# Altium PCB 拼板.PcbDoc (part 2 of 2)
Units mm, origin at the board's own origin, x right, y up, seen from the top; angles counter-clockwise.
Board outline 44.22 x 88.11 mm, 2 copper layers (Top Layer, Bottom Layer); 126 components, 77 nets, 529 pads, 164 vias.
Unrouted connection lines stored in the file: 26.
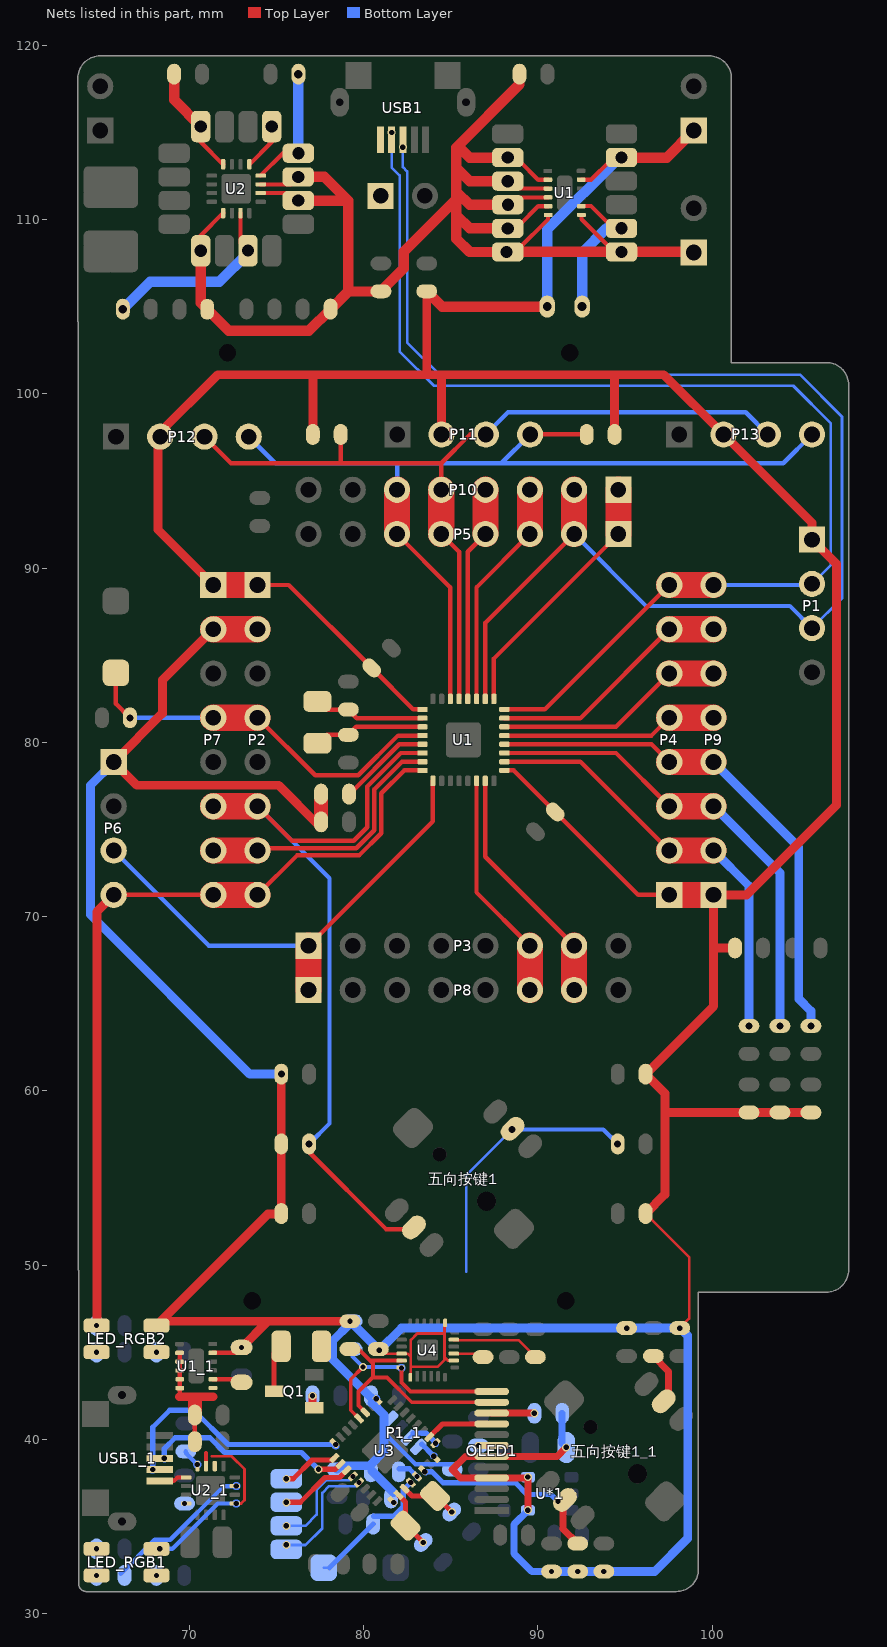
[diagram p2: the nets of this part, all layers, seen from the top]

## Via types
v1: diameter 0.46, hole 0.3, Top Layer to Bottom Layer, tented both sides, 77 vias
v2: diameter 0.3, hole 0.3, Top Layer to Bottom Layer, tented both sides, 30 vias
v3: diameter 1.1, hole 0.7, Top Layer to Bottom Layer, tented both sides, 30 vias
v4: diameter 0.64, hole 0.4, Top Layer to Bottom Layer, tented both sides, 21 vias
v5: diameter 0.8, hole 0.5, Top Layer to Bottom Layer, tented both sides, 6 vias

## Nets (pads, with @x,y where several pads share a name; then routed paths per layer and width w, separated by ;. In a path a pad name is that pad's centre, name@x,y a point inside that pad or via, vN(x,y) a via of type N, cw(c..) or ccw(c..) an arc to the next point about the centre after c; other vN are vias at no path point) (continued)
NetI1_2: I1.2@92.531,104.999 I1_1.2 pad.0@94.794,109.489 U1.2@92.489,110.763 U1_1.2 | length 9.3
  Top Layer w0.24: U1.2@92.489,110.763 93.049,110.763 pad.0@94.132,109.68
  Top Layer w0.254: U1_1.2@71.351,43.457 I1_1.2@72.66,43.457
  Bottom Layer w0.6: v5(92.531,104.999) 92.531,108.086 93.934,109.489 v3(94.794,109.489)
NetI2_2: I2.2 U3.5 | length 1.3
  Bottom Layer w0.254: v2@83.074,37.781 ccw(c83.059,37.88) v2@83.157,37.864
  Bottom Layer w0.3: I2.2@82.02,38.323 82.615,38.323 v2(83.059,37.88)
NetLED_RGB1_1: LED_RGB1.1 R1_1.1
  other v1: 64.678,33.726
NetLED_RGB1_3: LED_RGB1.3 R4_1.1
  other v1: 64.678,32.202
NetLED_RGB1_4: LED_RGB1.4 R2_1.1
  other v1: 68.107,32.202
NetLED_RGB2_1: LED_RGB2.1 R5_1.1
  other v1: 64.678,46.534
NetLED_RGB2_3: LED_RGB2.3 R8_1.1
  other v1: 64.678,45.01
NetLED_RGB2_4: LED_RGB2.4 R6_1.1
  other v1: 68.107,45.01
NetMotor-_2: Motor-.2 Q1.3 | length 2.7
  Top Layer w0.3: Q1.3@74.863,42.768 74.863,44.933 Motor-.2@75.277,45.346
NetOLED1_7: OLED1.7 R23.1
  other v2: 86.592,39.657
NetOLED1_10: OLED1.10 R22.1 | length 2.4
  Top Layer w0.152: v1@89.783,41.514 v1(89.793,41.504)
  Top Layer w0.4: OLED1.10@87.348,41.514 v1@89.783,41.514
NetPA15_1: PA15.1 U3.25 | length 3.3
  Top Layer w0.3: v1(75.562,37.745) 75.956,37.745 77.036,38.825 78.206,38.825 U3.25@78.321,38.94
NetPB4_1: PB4.1 U3.27 | length 4.2
  Top Layer w0.3: v1(75.562,36.396) 76.359,36.396 77.778,37.815 78.61,37.815 U3.27@79.028,38.233
NetPB5_1: PB5.1 U3.28 | length 5.8
  Bottom Layer w0.152: v1(75.562,35.047) 76.655,35.047 77.302,35.694 77.302,37.11 77.855,37.663 79.165,37.663 v2(79.382,37.88)
NetPB6_1: PB6.1 U3.29 | length 6.8
  Bottom Layer w0.152: PB6.1@75.556,33.948 76.667,33.948 77.626,34.907 77.626,36.936 78.01,37.32 79.529,37.32 v2(79.735,37.526)
  other v1: 75.562,33.954
NetQ1_1: Q1.1 R26.1 | length 0.7
  Top Layer w0.3: Q1.1@77.067,41.914 Q1.1@77.163,41.818
  Top Layer w0.46: Q1.1@77.067,41.914 v1(77.067,42.508)
NetR1_2: pad.0@70.654,115.327 R1.2@69.125,118.334 U2.16 | length 6.3
  Top Layer w0.24: v3(70.654,115.327) 70.654,114.449 U2.16@71.94,113.163
  Top Layer w0.6: R1.2@69.125,118.334 69.125,116.855 v3(70.654,115.327)
NetR2_2: pad.0@76.254,113.799 R2.2@76.254,118.334 U2.12 | length 7.2
  Top Layer w0.24: U2.12@74.09,112.513 75.376,113.799 v3(76.254,113.799)
  Bottom Layer w0.6: v3(76.254,113.799) v5(76.254,118.334)
NetR3_2: R3_1.2 U2_1.16
  other v2: 69.726,36.322
NetR4_2: R4.2@94.577,56.959 五向按键1.5 | length 15.7
  Bottom Layer w0.152: 85.877,49.627 85.877,55.143 v4(88.519,57.785)
  Bottom Layer w0.254: v4(88.519,57.785) 93.751,57.785 v4(94.577,56.959)
NetR7_2: R7_1.2 U2_1.12 | length 1.7
  Bottom Layer w0.254: R7_1.2@69.797,39.32 ccw(c70.042,39.32) 69.868,39.147 v2@70.38,38.635 ; v2(70.457,38.558) v2@70.38,38.635 ; v2@70.38,38.635 ccw(c70.457,38.558) 70.565,38.558 ccw(c70.457,38.558) v2@70.38,38.635
NetR17_2: R17.2 五向按键1_1.5 | length 3.1
  Top Layer w0.4: R17.2@96.619,44.788 97.495,43.911 97.495,42.472 五向按键1_1.5@97.212,42.188
NetR20_2: R20.2 U4.11 | length 5.1
  Top Layer w0.152: U4.11@85.176,45.695 88.879,45.695 R20.2@89.85,44.724
NetR21_2: R21.2 U4.9 | length 1.7
  Top Layer w0.152: U4.9@85.173,44.927 86.713,44.927 R21.2@86.853,44.788
NRST: C4.2 C6_1.2 P2.4 P7.4 S1.2 S1_1.2 U1.4@83.375,80.387 U3.4 | length 29.7
  Top Layer w0.254: S1.2@65.786,83.979 65.786,82.207 v4(66.586,81.407) ; P2.4@73.914,81.407 77.216,78.105 79.692,78.105 81.974,80.387 U1.4@83.375,80.387
  Top Layer w1.5: P7.4@71.374,81.407 P2.4@73.914,81.407
  Bottom Layer w0.152: S1_1.2@77.709,32.64 S1_1.2@78.039,32.64
  Bottom Layer w0.254: v4(66.586,81.407) P7.4@71.374,81.407 ; v2@82.651,37.61 ccw(c82.705,37.526) 82.634,37.455 ccw(c82.705,37.526) v2@82.771,37.451
  Bottom Layer w0.3: S1_1.2@78.039,32.64 C6_1.2@80.547,35.148 ; C6_1.2@80.579,35.593 81.709,35.593 82.272,36.156 82.272,37.093 82.634,37.455 v2(82.705,37.526)
OLED-RST: OLED1.9 U3.10 | length 3.9
  Top Layer w0.3: U3.10@83.766,40.142 84.517,40.894 OLED1.9@87.348,40.894
OSC32-IN: C1.1@79.121,81.877 C2_1.1 U1.2@83.375,81.387 U3.2 Y1.2 Y1_1.2 | length 9.8
  Top Layer w0.152: Y1_1.2@82.402,35.058 Y1_1.2@82.447,35.058
  Top Layer w0.254: Y1.2@77.343,82.296 77.762,81.877 C1.1@79.121,81.877 79.611,81.387 U1.2@83.375,81.387
  Top Layer w0.3: U3.2@81.998,36.819 82.402,36.415 Y1_1.2@82.402,35.058 ; Y1_1.2@82.447,35.058 v1(83.417,34.088)
OSC32-OUT: C2.1@79.121,80.429 C5_1.1 U1.3@83.375,80.887 U3.3 Y1.1 Y1_1.1 | length 9.7
  Top Layer w0.152: Y1_1.1@84.099,36.755 Y1_1.1@84.141,36.755
  Top Layer w0.254: Y1.1@77.343,79.896 77.876,80.429 C2.1@79.121,80.429 79.579,80.887 U1.3@83.375,80.887
  Top Layer w0.3: U3.3@82.352,37.172 82.769,36.755 Y1_1.1@84.099,36.755 ; Y1_1.1@84.141,36.755 v1(85.055,35.841)
PA1: P2.7 P7.7 U1.7@83.375,78.887 | length 15.5
  Top Layer w0.254: P2.7@73.914,73.787 74.041,73.914 79.569,73.914 80.607,74.952 80.607,77.295 82.199,78.887 U1.7@83.375,78.887
  Top Layer w1.5: P7.7@71.374,73.787 P2.7@73.914,73.787
PA8: D2.2@102.108,63.729 P4.2@97.536,73.787 P9.2 U1.18 | length 25
  Top Layer w0.254: U1.18@88.075,78.887 92.436,78.887 P4.2@97.536,73.787
  Top Layer w1.5: P4.2@97.536,73.787 P9.2@100.076,73.787
  Bottom Layer w0.508: P9.2@100.076,73.787 102.108,71.755 v4(102.108,63.729)
PA9: D3.2 P4.3 P9.3 U1.19 | length 27.4
  Top Layer w0.254: U1.19@88.075,79.387 94.476,79.387 P4.3@97.536,76.327
  Top Layer w1.5: P4.3@97.536,76.327 P9.3@100.076,76.327
  Bottom Layer w0.508: P9.3@100.076,76.327 103.886,72.517 v4(103.886,63.729)
PA10: D4.2 P4.4 P9.4 U1.20 | length 29.9
  Top Layer w0.254: U1.20@88.075,79.887 96.516,79.887 P4.4@97.536,78.867
  Top Layer w1.5: P4.4@97.536,78.867 P9.4@100.076,78.867
  Bottom Layer w0.508: P9.4@100.076,78.867 104.965,73.977 104.965,65.278 105.664,64.58 v4(105.664,63.729)
PA11: P4.5 P9.5 U1.21 | length 12.4
  Top Layer w0.254: U1.21@88.075,80.387 96.516,80.387 P4.5@97.536,81.407
  Top Layer w1.5: P4.5@97.536,81.407 P9.5@100.076,81.407
PA12: P4.6 P9.6 U1.22 | length 13.3
  Top Layer w0.254: U1.22@88.075,80.887 94.476,80.887 P4.6@97.536,83.947
  Top Layer w1.5: P4.6@97.536,83.947 P9.6@100.076,83.947
PA13: P4.7 P9.7 U1.23 | length 14.1
  Top Layer w0.254: U1.23@88.075,81.387 92.436,81.387 P4.7@97.536,86.487
  Top Layer w1.5: P4.7@97.536,86.487 P9.7@100.076,86.487
PA15: P5.1 P10.1 U1.25 | length 15
  Top Layer w0.254: U1.25@87.475,82.487 87.475,84.808 P5.1@94.615,91.948
  Top Layer w1.5: P5.1@94.615,91.948 P10.1@94.615,94.488
PB0: P3.6 P8.6 U1.14 | length 13.3
  Top Layer w0.254: U1.14@86.475,77.787 86.475,71.386 P3.6@89.535,68.326
  Top Layer w1.5: P8.6@89.535,65.786 P3.6@89.535,68.326
PB1: P3.7 P8.7 U1.15 | length 14.1
  Top Layer w0.254: U1.15@86.975,77.787 86.975,73.426 P3.7@92.075,68.326
  Top Layer w1.5: P8.7@92.075,65.786 P3.7@92.075,68.326
PB4: P5.3 P10.3 U1.27 | length 13.3
  Top Layer w0.254: U1.27@86.475,82.487 86.475,88.888 P5.3@89.535,91.948
  Top Layer w1.5: P5.3@89.535,91.948 P10.3@89.535,94.488
PB5: P5.4 P10.4 U1.28 | length 12.4
  Top Layer w0.254: U1.28@85.975,82.487 85.975,90.928 P5.4@86.995,91.948
  Top Layer w1.5: P5.4@86.995,91.948 P10.4@86.995,94.488
PB6: P5.5 P10.5 P11.3 P12.3 P13.3 R9.1 U1.29 | length 50.5
  Top Layer w0.254: P12.3@70.739,97.663 P12.3@70.866,97.536 72.39,96.012 78.676,96.012 ; R9.1@78.683,97.663 78.683,96.019 78.676,96.012 ; P5.5@84.455,91.948 85.475,90.928 U1.29@85.475,82.487 ; P10.5@84.455,94.488 84.455,96.012 ; P11.3@87.011,97.663 86.106,97.663 84.455,96.012 ; 78.676,96.012 84.455,96.012
  Top Layer w1.5: P5.5@84.455,91.948 P10.5@84.455,94.488
  Bottom Layer w0.254: P11.3@87.011,97.663 88.281,98.933 101.917,98.933 P13.3@103.188,97.663
PB7: P5.6 P10.6 P11.4 P12.4 P13.4 R8.1 U1.30 | length 54.2
  Top Layer w0.254: P5.6@81.915,91.948 84.975,88.888 U1.30@84.975,82.487 ; P11.4@89.551,97.663 R8.1@92.799,97.663
  Top Layer w1.5: P5.6@81.915,91.948 P10.6@81.915,94.488
  Bottom Layer w0.254: P12.4@73.279,97.663 P12.4@73.406,97.536 74.93,96.012 81.915,96.012 ; P10.6@81.915,94.488 81.915,96.012 ; P11.4@89.551,97.663 87.9,96.012 ; P13.4@105.727,97.663 104.076,96.012 87.9,96.012 ; 81.915,96.012 87.9,96.012
POWER: C1.2@88.941,118.334 C1_1.2 C2.1@80.988,105.877 C3_1.1 LED_RGB1.2 P2.1@98.941,108.107 pad.0@70.654,108.198 pad.0@76.242,112.437 pad.0@76.248,111.082 pad.0@88.269,108.131 pad.0@88.269,113.549 pad.0@88.273,109.486 pad.0@88.273,112.194 pad.0@88.276,110.84 pad.0@94.798,108.134 R3.1@78.1,104.859 R4.1@71.026,104.846 U1.1@92.493,110.258 U1.8@90.574,112.275 U1.9@90.578,111.77 U1.10@90.581,111.265 U1.11@90.585,110.76 U1.12@90.589,110.255 U1_1.1 U1_1.8 U1_1.9 U1_1.10 U1_1.11 U1_1.12 U2.5 U2.10 U2.11 U2_1.5 U2_1.10 U2_1.11 | length 110.5
  Top Layer w0.152: 71.301,39.028 72.432,39.028 73.162,38.298 73.162,36.52 72.967,36.325 U2_1.5@72.61,36.325
  Top Layer w0.24: v3(70.654,108.198) 70.654,109.076 U2.5@71.94,110.363 ; U2_1.11@70.96,38.475 70.96,39.224 ; U2.11@74.084,112.007 pad.0@75.812,112.007 ; U2.10@74.09,111.513 75.818,111.513 v3(76.248,111.082) ; v3(88.273,112.194) 88.697,111.77 U1.9@90.578,111.77 ; pad.0@88.701,111.265 U1.10@90.581,111.265 ; pad.0@88.854,108.286 90.574,110.006 U1.12@90.574,110.255 ; pad.0@88.93,113.358 90.013,112.275 U1.8@90.574,112.275 ; pad.0@88.934,109.677 90.017,110.76 U1.11@90.578,110.76 ; U1.1@92.493,110.258 92.493,110.009 pad.0@94.212,108.289
  Top Layer w0.254: U1_1.8@69.436,44.969 69.436,42.985 ccw(c69.488,42.985) U1_1.12@69.451,42.949 69.451,42.743 ; C3_1.1@70.311,39.873 C1_1.2@70.311,41.397
  Top Layer w0.5: 69.435,42.451 71.351,42.451
  Top Layer w0.6: v3(70.654,108.198) 70.654,105.218 R4.1@71.026,104.846 72.263,103.609 76.85,103.609 R3.1@78.1,104.859 79.106,105.865 ; v3(76.242,112.437) 77.75,112.437 79.106,111.082 ; v3(76.248,111.082) 79.106,111.082 ; C2.1@80.988,105.865 79.106,105.865 ; C2.1@80.988,105.877 82.311,107.201 82.311,108.143 85.316,111.148 ; 85.32,110.247 86.081,109.486 v3(88.273,109.486) ; 85.32,112.955 86.081,112.194 v3(88.273,112.194) ; v3(88.199,108.134) v3(94.798,108.134) P2.1@98.941,108.134 ; pad.0@88.269,108.131 86.077,108.131 85.316,108.892 85.316,111.148 ; v3(88.269,113.549) 86.077,113.549 85.506,114.12 85.316,114.12 ; v3(88.276,110.84) 86.085,110.84 85.324,111.601 85.324,111.155 85.316,111.148 ; C1.2@88.941,118.334 88.941,117.744 85.316,114.12 ; 79.106,105.865 79.106,111.082 ; 85.316,111.148 85.316,114.12
  Top Layer w0.8: C1_1.2@70.311,41.397 70.311,42.235
  Bottom Layer w0.254: v1(68.304,33.726) 69.028,33.726 71.63,36.327 v2@72.585,36.327 ; v2(72.693,36.327) v2@72.585,36.327 ; v2@72.585,36.327 ccw(c72.693,36.327) 72.801,36.327 ccw(c72.693,36.327) v2@72.585,36.327
SCL: OLED1.11 R12_1.2 U3.19 U4.23 | length 13.8
  Top Layer w0.22: R12_1.2@79.639,45.295 79.639,45.254 80.366,44.527 ; U3.19@80.089,41.557 79.703,41.943 79.703,42.749 80.503,43.549 ; 81.315,44.527 80.366,44.527 ; 81.315,44.527 U4.23@82.173,44.527 ; OLED1.11@87.348,42.134 82.756,42.134 81.341,43.549 80.541,43.549 80.541,44.352 80.366,44.527
SDA: OLED1.12 R13_1.2 U3.20 U4.24 | length 13.8
  Top Layer w0.22: U3.20@79.735,41.203 79.258,41.68 79.258,43.454 v1(79.969,44.165) ; v2(82.173,44.102) 82.173,43.27 82.689,42.754 OLED1.12@87.348,42.754
  Bottom Layer w0.152: R13_1.2@79.341,44.794 R13_1.2@79.341,45.181
  Bottom Layer w0.22: R13_1.2@79.341,44.794 v1(79.969,44.165) 82.085,44.165 v2@82.173,44.165
  Bottom Layer w0.254: v2@82.085,44.165 ccw(c82.173,44.102) 82.281,44.102 ccw(c82.173,44.102) v2@82.085,44.165
SWCLK: P1.2@105.727,89.09 P4.8 P9.8 U1.24 U3.24 USB1.2 USB1_1.2 | length 84.6
  Top Layer w0.254: U1.24@88.075,81.887 90.396,81.887 P4.8@97.536,89.027 ; P1.2@105.664,89.027 P1.2@105.727,89.09
  Top Layer w1.5: P4.8@97.536,89.027 P9.8@100.076,89.027
  Bottom Layer w0.152: v1(81.61,114.986) 81.61,112.979 82.067,112.522 82.067,102.413 84.023,100.457 104.648,100.457 106.807,98.298 106.807,90.17 P1.2@105.727,89.09
  Bottom Layer w0.254: v2@78.274,39.632 ccw(c78.4,39.711) v2@78.498,39.6 ; P9.8@100.076,89.027 P1.2@105.664,89.027 ; v2@67.898,38.378 ccw(c67.898,38.27) 68.006,38.27 ccw(c67.898,38.27) v2@67.898,38.378
  Bottom Layer w0.3: v2(67.898,38.27) 67.898,38.378 67.898,40.698 68.876,41.676 70.247,41.676 72.212,39.711 v2(78.4,39.711)
SWDIO: P1.3 P5.2 P10.2 U1.26 U3.26 USB1.3 USB1_1.3 | length 93.3
  Top Layer w0.254: U1.26@86.975,82.487 86.975,86.848 P5.2@92.075,91.948
  Top Layer w0.3: v1(77.404,38.285) 78.373,38.285 U3.26@78.675,38.587
  Top Layer w1.5: P5.2@92.075,91.948 P10.2@92.075,94.488
  Bottom Layer w0.152: v1(82.245,114.148) 82.245,113.005 82.499,112.751 82.499,102.946 84.353,101.092 105.029,101.092 107.442,98.679 107.442,88.265 P1.3@105.727,86.55
  Bottom Layer w0.254: P5.2@92.075,91.948 96.203,87.82 104.457,87.82 P1.3@105.727,86.55 ; v2@68.565,39.028 ccw(c68.565,38.92) 68.673,38.92 ccw(c68.565,38.92) v2@68.565,39.028
  Bottom Layer w0.3: v2(68.565,38.92) 68.565,39.028 68.565,39.472 69.193,40.101 71.182,40.101 72.025,39.259 76.43,39.259 v1(77.404,38.285)
UART-RX: P1_1.3 P3.1@76.835,68.326 P6.3 P8.1 U1.9@83.975,77.787 U3.9 | length 30.6
  Top Layer w0.254: P3.1@76.835,68.326 83.975,75.466 U1.9@83.975,77.787
  Top Layer w1.5: P8.1@76.835,65.786 P3.1@76.835,68.326
  Bottom Layer w0.152: P1_1.3@82.598,40.114 P1_1.3@82.833,40.349 ; v2(84.119,39.789) v2@84.119,39.836
  Bottom Layer w0.254: P6.3@65.659,73.787 71.12,68.326 P3.1@76.835,68.326 ; v2@84.03,39.833 ccw(c84.119,39.789) v2@84.2,39.73
  Bottom Layer w0.3: P1_1.3@82.833,40.349 82.84,40.356 83.599,40.356 v2@84.119,39.836
UART-TX: P1_1.4 P2.8 P6.4 P7.8 U1.8@83.375,78.387 U3.8 | length 48.5
  Top Layer w0.254: P6.4@65.659,71.247 P7.8@71.374,71.247 ; P2.8@73.914,71.247 76.175,73.508 79.737,73.508 81.013,74.784 81.013,77.076 82.324,78.387 U1.8@83.375,78.387
  Top Layer w0.508: 64.694,46.457 64.694,70.282 P6.4@65.659,71.247
  Top Layer w1.5: P7.8@71.374,71.247 P2.8@73.914,71.247
  Bottom Layer w0.254: v2@83.924,39.016 cw(c84.021,39.041) 83.95,39.111 cw(c84.021,39.041) v2@84.12,39.028
  Bottom Layer w0.3: P1_1.4@83.338,39.723 83.95,39.111 v2(84.021,39.041)
USB-POWER: P3.1@80.973,111.354 pad.0@74.726,115.327 U2.13 U2_1.13 USB1.1 USB1_1.1 | length 4.3
  Top Layer w0.24: USB1_1.1@68.292,37.62 69.103,37.62 69.308,37.825 U2_1.13@69.81,37.825 ; U2.13@73.44,113.163 74.726,114.449 v3(74.726,115.327)
USB-STA: D2.2@66.182,104.851 pad.0@73.364,108.21 R4_1.2 U2.7 U2_1.7 | length 19.8
  Top Layer w0.24: pad.0@72.934,108.641 U2.7@72.934,110.369
  Bottom Layer w0.254: R4_1.2@66.056,32.284 68.012,34.24 68.901,34.24 71.988,37.327 v2@72.585,37.327 ; v2(72.693,37.327) v2@72.585,37.327 ; v2@72.585,37.327 ccw(c72.693,37.327) 72.801,37.327 ccw(c72.693,37.327) v2@72.585,37.327
  Bottom Layer w0.6: v5(66.182,104.851) 67.762,106.431 71.726,106.431 73.364,108.07 v3(73.364,108.21)
VCC: C3.1 C4_1.1 C5.1 C6.1 C7.1 C8.1 C9.2 C10.1 C12.1 I1.1 I1_1.1 I2.1 I3.1 LED_RGB2.2 Motor+.1 OLED1.4 OLED1.6 P1.1@105.727,91.63 P1_1.1 P2.1@73.914,89.027 P2.2@73.914,86.487 P4.1 P6.1 P7.1 P7.2 P9.1 P11.2 P12.2 P13.2 pad.0@91.821,102.362 pad.0@94.79,113.552 R1.1@75.273,60.96 R2.2@96.177,60.96 R3.1@75.273,56.96 R5.1 R6.2 R8.2 R9.2 R10.1 R11.1 R12.1 R12_1.1 R13.1 R13_1.1 R14.1 R15.2 R16.1 R18.1 R19.2 R22.2 U1.1@83.375,81.887 U1.5@92.478,112.278 U1.17 U1_1.5 U3.1 U3.17 U4.1 U4.8 U4.13 U4.22 U*1.4 U*1.5 | length 363
  Top Layer w0.152: LED_RGB2.2@68.107,46.534 LED_RGB2.2@68.355,46.781 ; C9.2@81.138,44.927 U4.22@82.173,44.927 82.503,44.927 82.706,44.724 ; U4.1@82.673,43.627 U4.1@82.702,43.627 ; U4.1@82.706,43.625 82.706,44.165 ; 83.622,101.112 83.642,101.092 ; U4.13@84.64,46.629 84.64,46.076 ; U4.8@85.173,44.527 84.833,44.527 84.64,44.721 ; v1@89.368,37.794 v1(89.415,37.841) ; R6.2@96.177,52.959 98.679,50.457 98.679,46.93 v1(98.137,46.388) ; 82.706,44.165 82.706,44.724 ; 82.706,44.165 84.243,44.165 84.64,44.561 84.64,44.721 ; 82.706,44.724 82.706,45.708 83.075,46.076 84.64,46.076 ; 84.64,44.721 84.64,46.076
  Top Layer w0.24: U1.5@92.485,112.278 93.046,112.278 pad.0@94.129,113.361
  Top Layer w0.254: U1_1.5@71.34,44.972 I1_1.1@73.276,44.972 ; P2.1@73.914,89.027 75.704,89.027 C3.1@80.46,84.27 82.844,81.887 U1.1@83.375,81.887 ; 77.083,101.086 77.089,101.092 ; 84.455,101.092 84.471,101.076 ; U1.17@88.075,78.387 88.606,78.387 C6.1@90.99,76.004 95.746,71.247 P4.1@97.536,71.247 ; 94.399,101.067 94.424,101.092 ; 97.282,58.801 97.32,58.763
  Top Layer w0.4: v1@89.368,37.794 OLED1.4@87.348,37.794 85.566,37.794 85.081,38.279 85.836,39.034 OLED1.6@87.348,39.034 91.105,39.034 v1(91.619,39.548) ; v1(89.415,35.941) v1(89.415,37.841)
  Top Layer w0.508: P7.2@71.374,86.487 68.453,83.566 68.453,81.661 P6.1@65.659,78.867 66.992,77.534 75.12,77.534 77.406,75.248 C5.1@77.559,75.248 ; P7.1@71.374,89.027 68.199,92.202 68.199,97.663 71.628,101.092 77.089,101.092 83.642,101.092 84.455,101.092 94.424,101.092 97.218,101.092 P13.2@100.647,97.663 105.727,92.583 P1.1@105.727,91.63 107.124,90.233 107.124,76.391 101.981,71.247 P9.1@100.076,71.247 100.076,68.199 ; v1(72.997,45.279) 74.499,46.781 68.355,46.781 74.507,52.934 75.298,52.934 R5.1@75.273,52.959 R3.1@75.273,56.96 v4(75.273,60.96) ; 74.5,46.783 v1(79.209,46.783) ; R9.2@77.083,97.663 77.083,101.086 ; 83.622,101.112 C3.1@83.622,105.877 ; P11.2@84.471,97.663 84.471,101.076 ; R8.2@94.399,97.663 94.399,101.067 ; R6.2@96.177,52.959 97.282,54.064 97.282,58.801 97.282,59.855 R2.2@96.177,60.96 100.076,64.859 100.076,68.199 ; 97.32,58.763 R11.1@102.108,58.763 R12.1@103.886,58.763 R13.1@105.664,58.763 ; R10.1@101.308,68.199 100.076,68.199
  Top Layer w0.6: C3.1@83.622,105.877 84.501,104.999 v5(90.531,104.999) ; v3(94.79,113.552) 97.39,113.552 P4.1@98.941,115.103
  Top Layer w0.8: C5.1@77.559,75.248 C5.1@77.559,75.438 I1.1@77.559,77.026
  Top Layer w1.5: P7.2@71.374,86.487 P2.2@73.914,86.487 ; P7.1@71.374,89.027 P2.1@73.914,89.027 ; P4.1@97.536,71.247 P9.1@100.076,71.247
  Bottom Layer w0.152: v1(79.209,46.783) R13_1.1@79.377,46.783 ; I2.1@80.42,38.412 I2.1@80.55,38.282 ; C10.1@80.42,42.139 C10.1@80.42,42.4 ; I3.1@91.393,39.774 v1(91.619,39.548)
  Bottom Layer w0.254: 81.169,40.387 82.973,38.583 C12.1@85.138,38.583 ; v2@80.825,42.341 ccw(c80.717,42.341) v2@80.825,42.341
  Bottom Layer w0.4: I3.1@91.393,39.774 R22.2@91.393,41.504
  Bottom Layer w0.406: U*1.4@89.424,35.933 88.624,35.133 88.624,33.446 89.647,32.424 v1(90.783,32.424)
  Bottom Layer w0.508: P6.1@65.659,78.867 64.325,77.534 64.325,70.104 73.469,60.96 v4(75.273,60.96) ; C8.1@78.471,38.291 78.668,38.488 80.344,38.488 81.169,39.314 81.169,40.387 81.169,41.416 C10.1@80.484,42.101 ; v1(79.209,46.783) 79.209,46.649 78.21,45.651 78.21,44.61 C10.1@80.42,42.4 ; R13_1.1@79.377,46.783 79.377,46.637 v1(80.89,45.124) 82.173,46.388 v1(95.089,46.388) v1(98.137,46.388) 98.162,46.388 98.594,45.956 98.594,34.323 96.695,32.424 v1(93.78,32.424) v1(92.282,32.424) v1(90.783,32.424) ; I2.1@80.468,38.199 C7.1@81.706,36.961
  Bottom Layer w0.6: v5(90.531,104.999) 90.531,109.432 94.651,113.552 v3(94.79,113.552)
  other v2: 81.723,36.388 80.717,42.341
VDDA: I1.2@79.159,77.026 U1.5@83.375,79.887 | length 5.4
  Top Layer w0.254: I1.2@79.173,77.011 82.049,79.887 U1.5@83.375,79.887
WK-UP: P2.6 P7.6 R3.2@76.873,56.96 R16.2 U1.6@83.375,79.387 U3.6 五向按键1.2 五向按键1_1.2 | length 57.4
  Top Layer w0.254: P2.6@73.914,76.327 75.882,74.358 79.438,74.358 80.2,75.12 80.2,77.464 82.124,79.387 U1.6@83.375,79.387 ; v4(76.873,56.96) 76.873,56.477 81.28,52.07 五向按键1.2@82.804,52.07
  Top Layer w0.4: v1(91.145,36.45) 91.431,36.164 91.431,34.875 R16.2@92.282,34.024
  Top Layer w1.5: P7.6@71.374,76.327 P2.6@73.914,76.327
  Bottom Layer w0.254: P2.6@73.914,76.327 78.041,72.2 78.041,58.128 v4(76.873,56.96) ; v2@83.524,38.048 ccw(c83.5,38.145) v2@83.566,38.07
  Bottom Layer w0.3: v2(83.5,38.145) 83.925,38.145 84.556,37.515 88.722,37.515 88.722,37.495 89.367,36.85 90.745,36.85 v1(91.145,36.45)
pads on no net: U1.0 U1.4@92.481,111.773 U1.6@92.474,112.783 U1.7@90.57,112.78 U1_1.0 U1_1.4 U1_1.6 U1_1.7 U2.0 U2.15 U2_1.15 U3.15 U4.2 U4.3 U4.4 U4.5 U4.6 U4.7 U4.12 U4.14 U4.15 U4.16 U4.17 U4.19 U4.21 USB1.0 USB1.4 USB1_1.0 USB1_1.4 五向按键1.0 五向按键1_1.0
copper on no net: | length 16.6
  Top Layer w0.152: 83.473,46.627 v4(83.473,48.023) ; 84.273,46.627 v4(84.273,48.023)
  Top Layer w0.24: 72.446,113.157 72.446,114.884 ; 88.85,114.748 90.57,113.029 90.57,112.78 ; 92.481,111.773 94.362,111.773 ; 92.489,112.783 92.489,113.032 94.209,114.751
  Bottom Layer w0.152: v4(83.473,48.023) 85.319,49.868 ; v4(84.273,48.023) 85.877,49.627
  other v1: 88.629,52.086
  other v3: 94.786,112.197 88.265,114.903 94.794,114.906 72.015,115.315

## Polygon pours and split planes (outlines as drawn)
GND on Bottom Layer "Bottom Layer-GND" (solid, pour order 14): 64.139,47.467 64.145,47.473 97.94,47.473 cw(c97.94,46.203) 99.21,46.203 99.21,32.545 cw(c97.94,32.545) 97.94,31.275 64.126,31.275 cw(c64.126,31.757) 63.643,31.757 63.643,46.972 cw(c64.139,46.972)
GND on Top Layer "Top Layer-GND" (solid, pour order 16): 64.145,47.473 97.94,47.473 cw(c97.94,46.203) 99.21,46.203 99.21,32.545 cw(c97.94,32.545) 97.94,31.275 64.101,31.275 cw(c64.101,31.732) 63.643,31.732 63.643,46.972 cw(c64.145,46.972)

## Keep-outs
Keep-Out Layer:
  lines w0.254: 63.604,104.125 63.604,118.113 cw(c64.874,118.113) 64.874,119.383 67.089,119.383 99.83,119.383 cw(c99.83,118.113) 101.1,118.113 101.1,102.032 101.1,101.79 106.553,101.79 cw(c106.553,100.52) 107.823,100.52 107.823,49.721 cw(c106.553,49.721) 106.553,48.45 99.21,48.45 99.21,47.752 99.21,32.545 cw(c97.94,32.545) 97.94,31.275 64.101,31.275 cw(c64.101,31.732) 63.643,31.732 63.643,49.721 ; 63.627,49.721 63.627,90.424 63.627,104.125

## Other copper
Top Layer:
  rectangle net VCC: 77.029,45.429 78.128,46.896
  rectangle net NetMotor-_2: 74.718,42.921 75.385,44.749
  rectangle net BAT-POWER: 70.901,35.377 71.479,35.974
  rectangle net POWER: 71.105,42.451 71.606,42.978
  rectangle net POWER: 69.187,42.451 69.701,44.94
  rectangle net USB-POWER: 75.001,114.635 81.153,115.334
  rectangle net USB-POWER: 80.221,111.869 81.153,115.334
  rectangle net GND: 83.353,111.326 84.272,115.324
  region: 69.748,42.959
  region: 70.832,38.793
  region net POWER: 70.838,38.698 ccw(c70.256,38.698) 70.256,39.279 cw(c70.311,39.676) 69.911,39.676 69.911,41.593 cw(c70.311,41.593) 70.311,41.993 cw(c70.311,41.593) 70.711,41.593 70.711,40.057 ccw(c71.018,40.057) 70.801,39.84 71.39,39.25 cw(c70.946,38.806) 71.575,38.806 71.575,38.228 cw(c71.524,38.228) 71.524,38.177 70.895,38.177 cw(c70.895,38.234) 70.838,38.234

## Silkscreen, mask and mechanical layers (free items; w line width, h text height)
Top Overlay:
  lines w0.203: 64.389,64.579 64.389,69.977 ; 106.998,77.343 106.998,82.74
  text "B-" at 66.538,117.17 h1.8
  text "G" at 96.291,117.135 h1.8
  text "B+" at 66.538,114.531 h1.8
  text "3V3" at 97.648,112.377 h1.8
  text "G" at 96.291,110.139 h1.8
  text "BAT-" at 63.962,109.403 h1.8
  text "BAT+" at 63.962,105.71 h1.8
  text "VOUT" at 95.938,105.334 h1.8
  text "GND" at 65.659,99.123 h1.27 r60
  text "VCC" at 68.199,99.123 h1.27 r60
  text "SCL" at 70.739,99.123 h1.27 r60
  text "SDA" at 73.279,99.123 h1.27 r60
  text "GND" at 81.931,99.123 h1.27 r60
  text "VCC" at 84.471,99.123 h1.27 r60
  text "SCL" at 87.011,99.123 h1.27 r60
  text "SDA" at 89.551,99.123 h1.27 r60
  text "GND" at 98.108,99.123 h1.27 r60
  text "VCC" at 100.647,99.123 h1.27 r60
  text "SCL" at 103.188,99.123 h1.27 r60
  text "SDA" at 105.727,99.123 h1.27 r60
  text "RST" at 64.262,89.154 h1.78
  text "VCC" at 67.564,88.519 h1.27
  text "SWC" at 101.6,88.519 h1.27
  text "GND" at 76.644,88.075 h1.27 r60
  text "BOOT0" at 79.184,88.075 h1.02 r60
  text "B7" at 81.724,88.075 h1.52 r60
  text "B6" at 84.264,88.075 h1.52 r60
  text "B5" at 86.804,88.075 h1.52 r60
  text "B4" at 89.344,88.075 h1.52 r60
  text "SWD" at 91.885,88.075 h1.27 r60
  text "A15" at 94.424,88.075 h1.52 r60
  text "VCC" at 67.564,85.979 h1.27
  text "A13" at 101.663,85.979 h1.52
  text "GND" at 67.564,83.439 h1.27
  text "A12" at 101.663,83.439 h1.52
  text "VCC" at 104.409,81.661 h1.27
  text "RST" at 67.691,80.899 h1.27
  text "A11" at 101.663,80.899 h1.52
  text "SWC" at 104.203,80.311 h1.27
  text "SWD" at 104.22,78.947 h1.27
  text "GND" at 67.564,78.359 h1.27
  text "A10" at 101.663,78.359 h1.52
  text "GND" at 104.356,77.597 h1.27
  text "A13" at 67.564,75.819 h1.52
  text "A13" at 101.663,75.819 h1.52
  text "A1" at 68.072,73.279 h1.52
  text "A8" at 102.044,73.279 h1.52
  text "TX" at 67.882,70.739 h1.52
  text "VCC" at 101.663,70.739 h1.27
  text "VCC" at 64.644,68.897 h1.27
  text "GND" at 64.643,67.547 h1.27
  text "POWER" at 102.743,66.294 h1.27
  text "RX" at 64.643,66.184 h1.52
  text "TX" at 64.643,64.834 h1.52
  text "B1" at 91.885,62.42 h1.52 r60
  text "B0" at 89.344,62.357 h1.52 r60
  text "A4" at 79.184,62.293 h1.52 r60
  text "A5" at 81.724,62.293 h1.52 r60
  text "A6" at 84.264,62.293 h1.52 r60
  text "A7" at 86.804,62.293 h1.52 r60
  text "RX" at 76.644,62.23 h1.52 r60
  text "GND" at 94.424,61.976 h1.27 r60
Top Solder:
  lines w0.24: 69.562,112.013 71.29,112.013 ; 69.568,111.519 71.296,111.519 ; 70.004,109.726 71.29,111.013 ; 70.004,113.799 71.29,112.513 ; 70.46,34.754 70.46,35.675 ; 70.654,109.076 71.94,110.363 ; 70.654,114.449 71.94,113.163 ; 71.46,34.862 71.46,35.675 ; 72.44,108.635 72.44,110.363 ; 72.446,113.157 72.446,114.884 ; 72.934,108.641 72.934,110.369 ; 72.94,113.163 72.94,114.89 ; 73.44,110.363 74.726,109.076 ; 73.44,113.163 74.726,114.449 ; 74.084,112.007 75.812,112.007 ; 74.09,111.013 75.376,109.726 ; 74.09,111.513 75.818,111.513 ; 74.09,112.513 75.376,113.799 ; 88.697,111.77 90.578,111.77 ; 88.701,111.265 90.581,111.265 ; 88.85,114.748 90.57,113.029 90.57,112.78 ; 88.854,108.286 90.574,110.006 90.574,110.255 ; 88.93,113.358 90.013,112.275 90.574,112.275 ; 88.934,109.677 90.017,110.76 90.578,110.76 ; 92.481,111.773 94.362,111.773 ; 92.485,111.268 94.366,111.268 ; 92.485,112.278 93.046,112.278 94.129,113.361 ; 92.489,110.763 93.049,110.763 94.132,109.68 ; 92.489,112.783 92.489,113.032 94.209,114.751 ; 92.493,110.258 92.493,110.009 94.212,108.289
  lines w0.254: 68.292,37.62 69.103,37.62 69.308,37.825 69.81,37.825 ; 71.34,44.972 73.276,44.972 ; 71.351,43.457 72.66,43.457

## Text inside footprints (layer, text, board x,y; h text height)
OLED1: Top Overlay "1" at 91.031,36.169 h1.52 r90